# Altium PCB optics.PcbDoc
Units mm, origin at the board's own origin, x right, y up, seen from the top; angles counter-clockwise.
Board outline 50 x 50 mm, 2 copper layers (Top Layer, Bottom Layer); 15 components, 21 nets, 102 pads, 0 vias.
Unrouted connection lines stored in the file: 1.
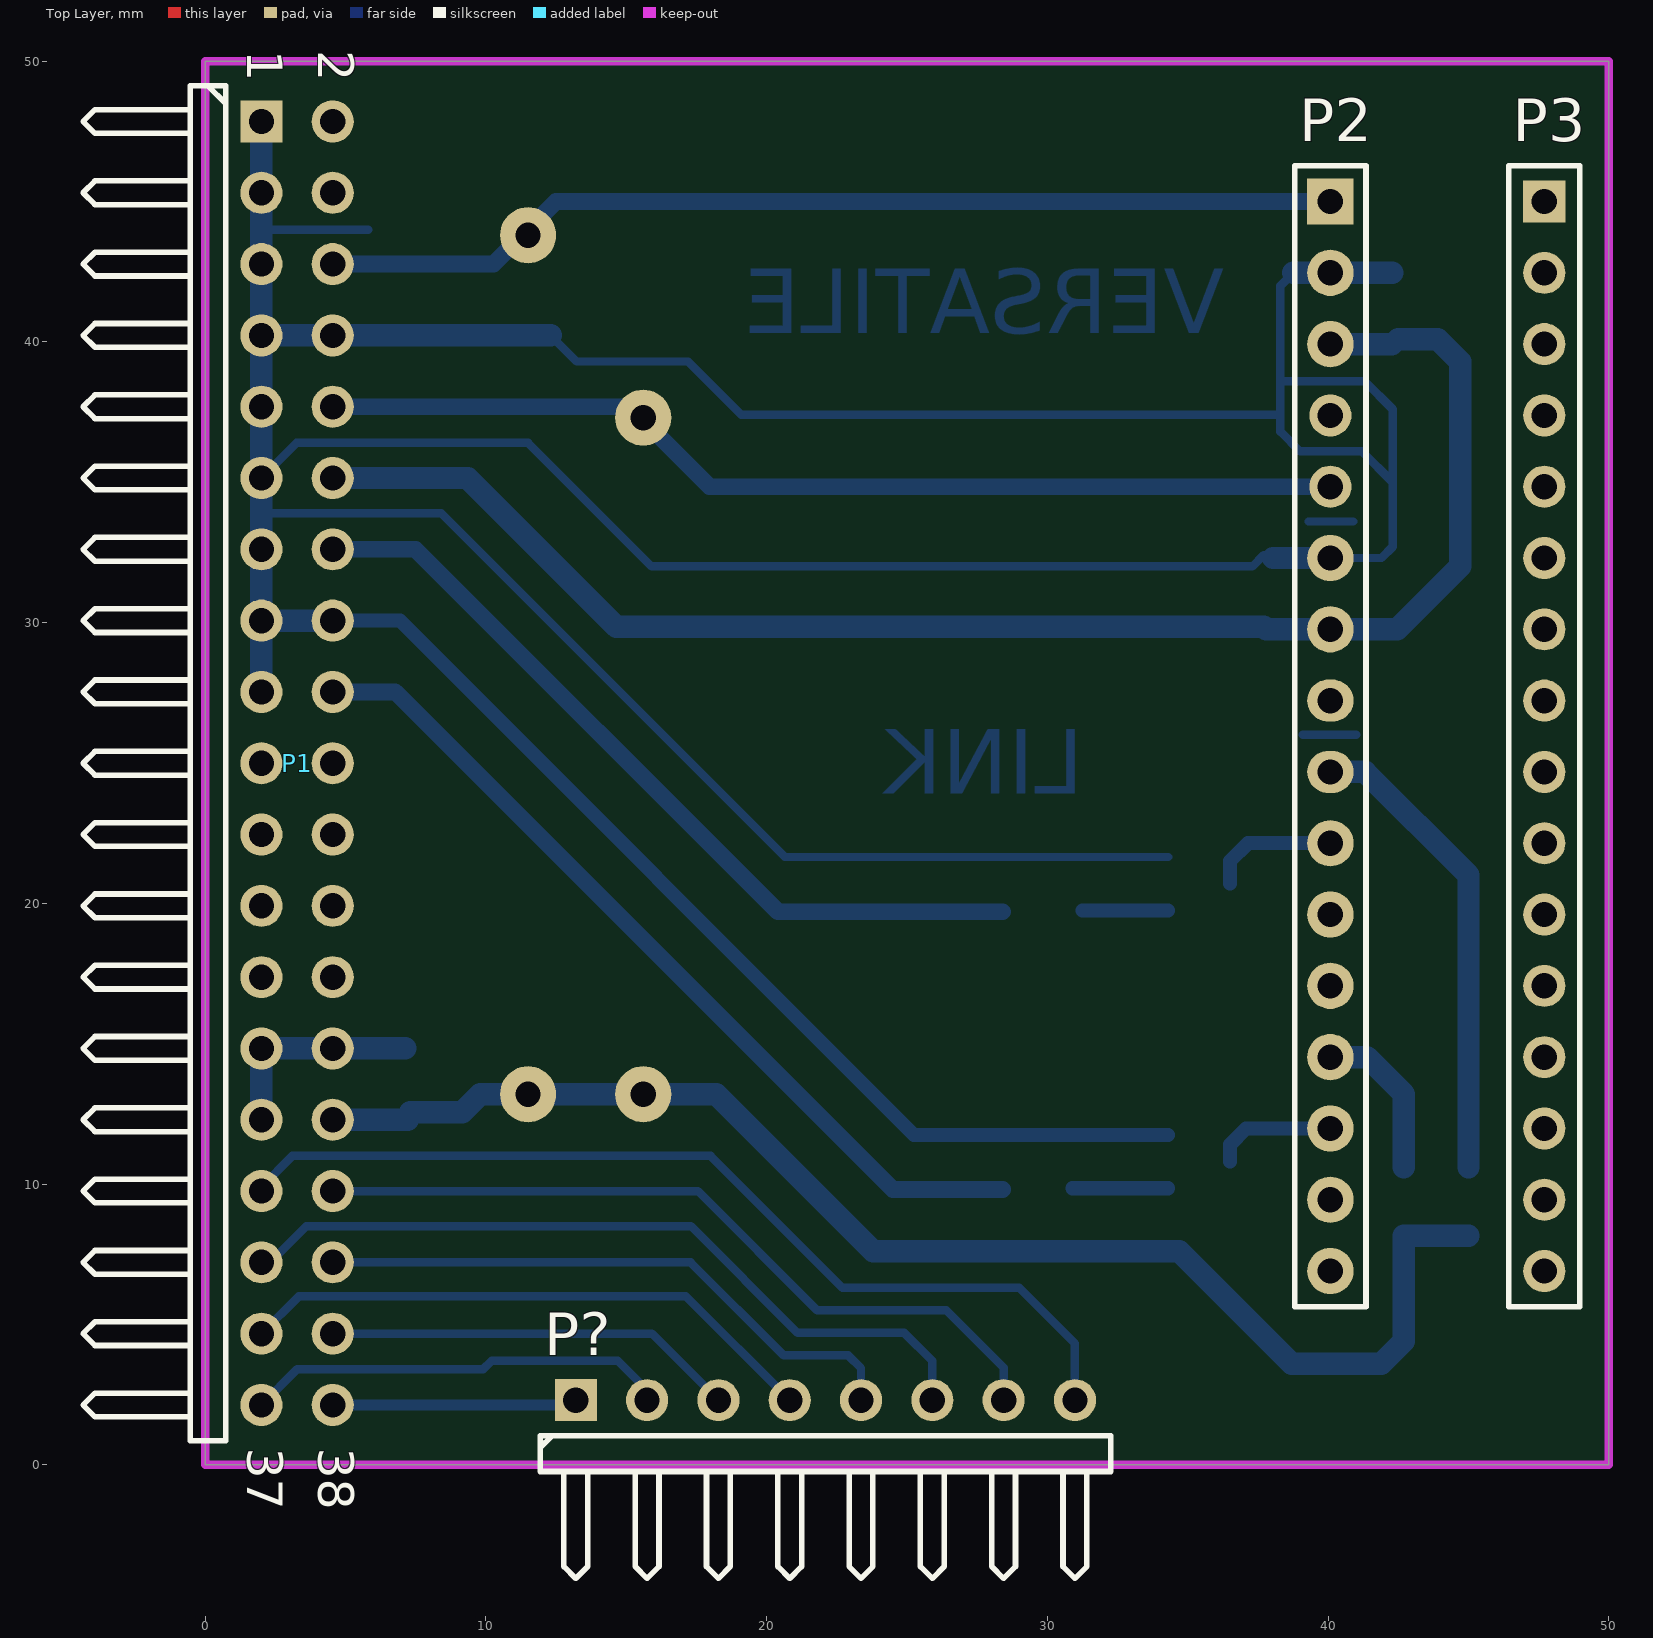
[diagram p0: Top Layer view]
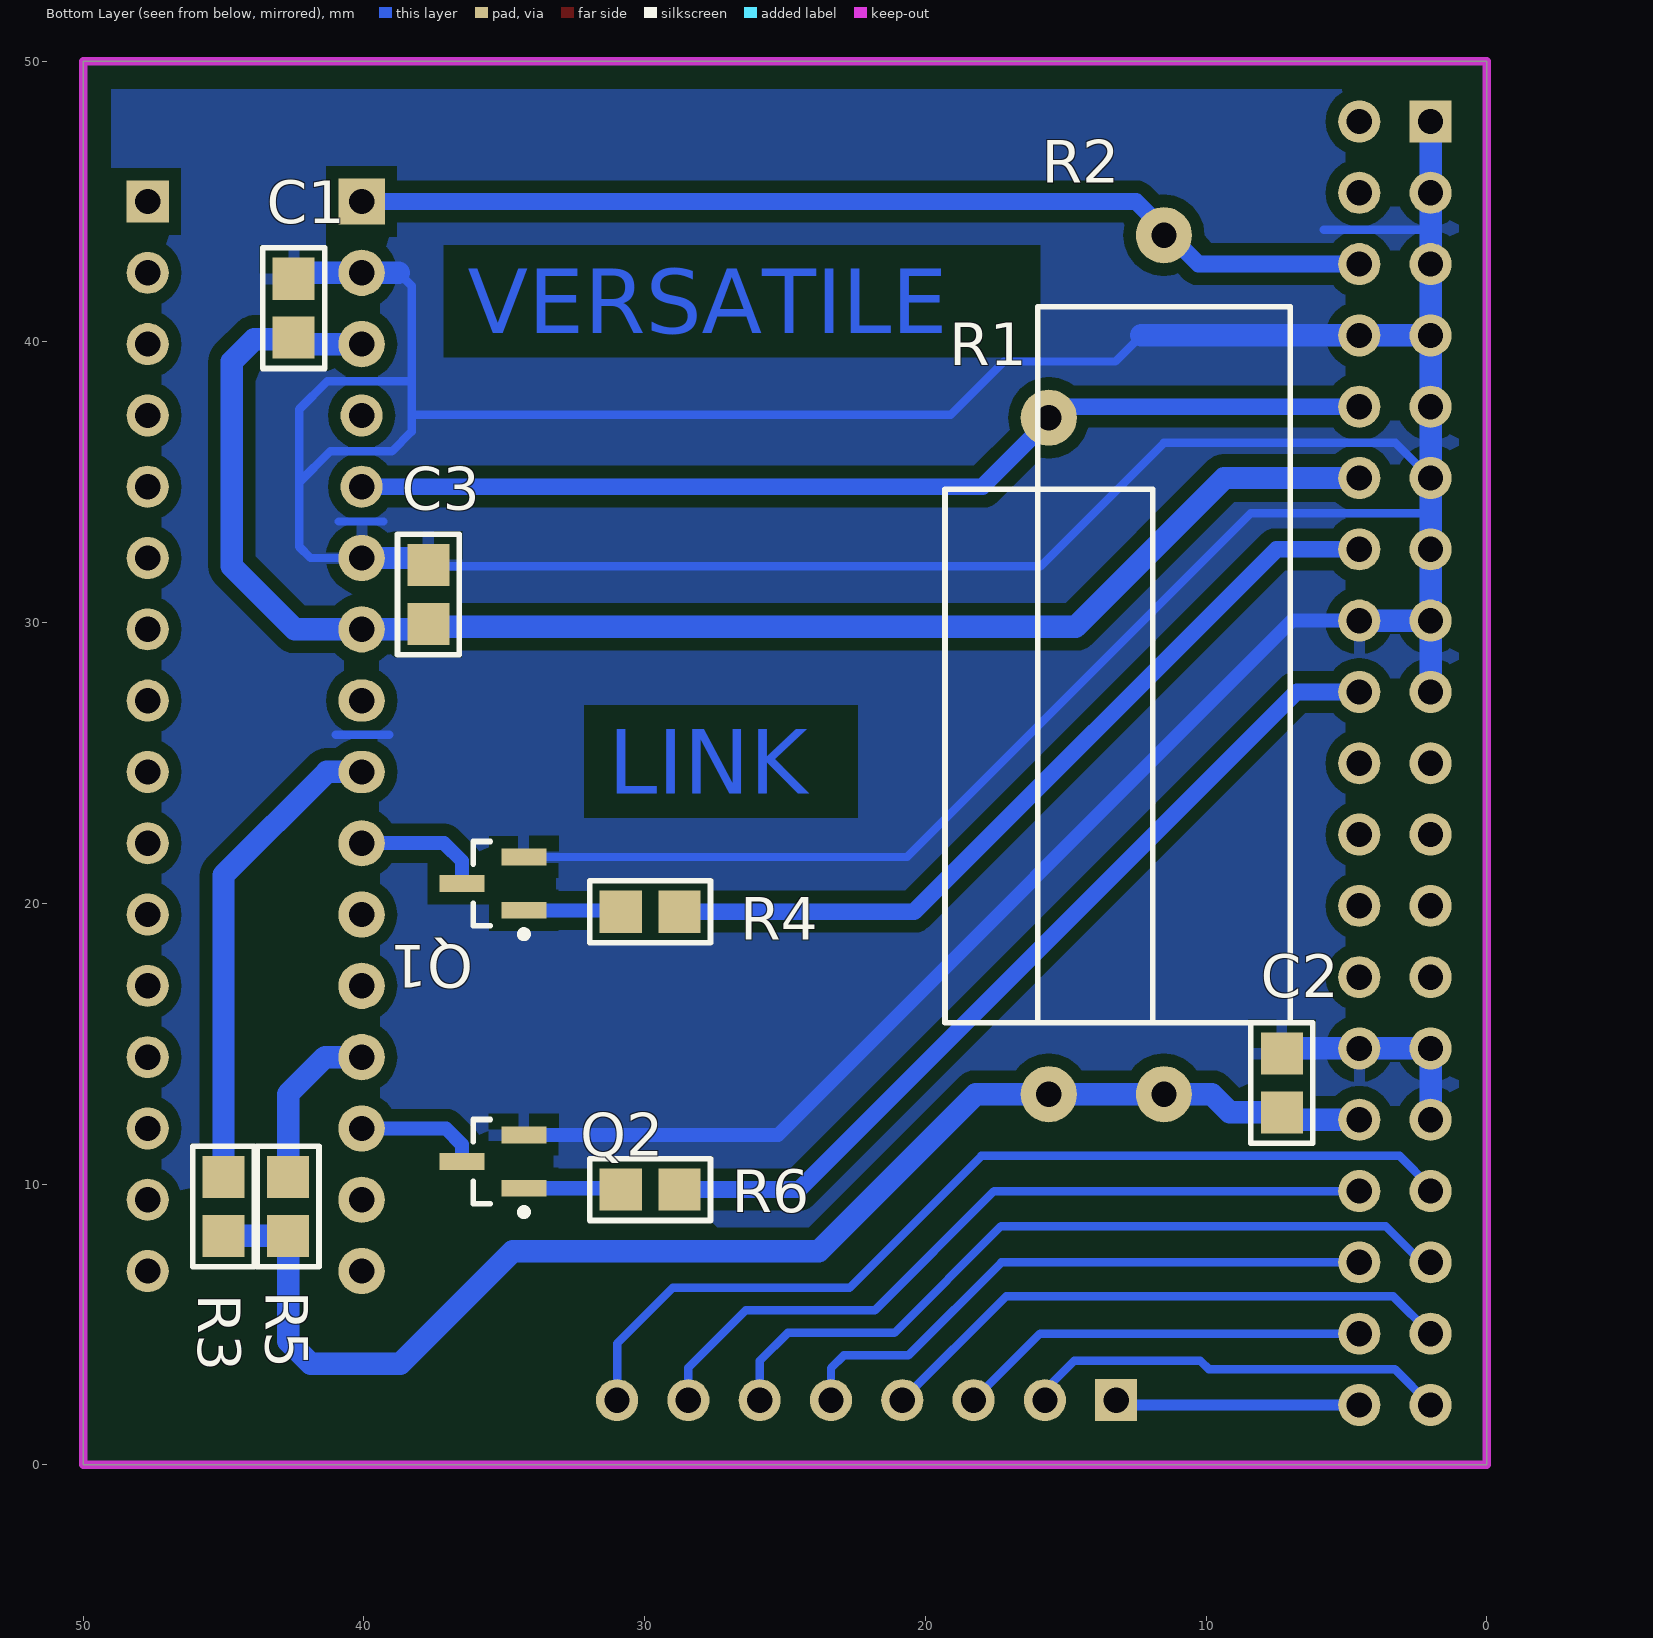
[diagram p1: Bottom Layer view, seen from below]
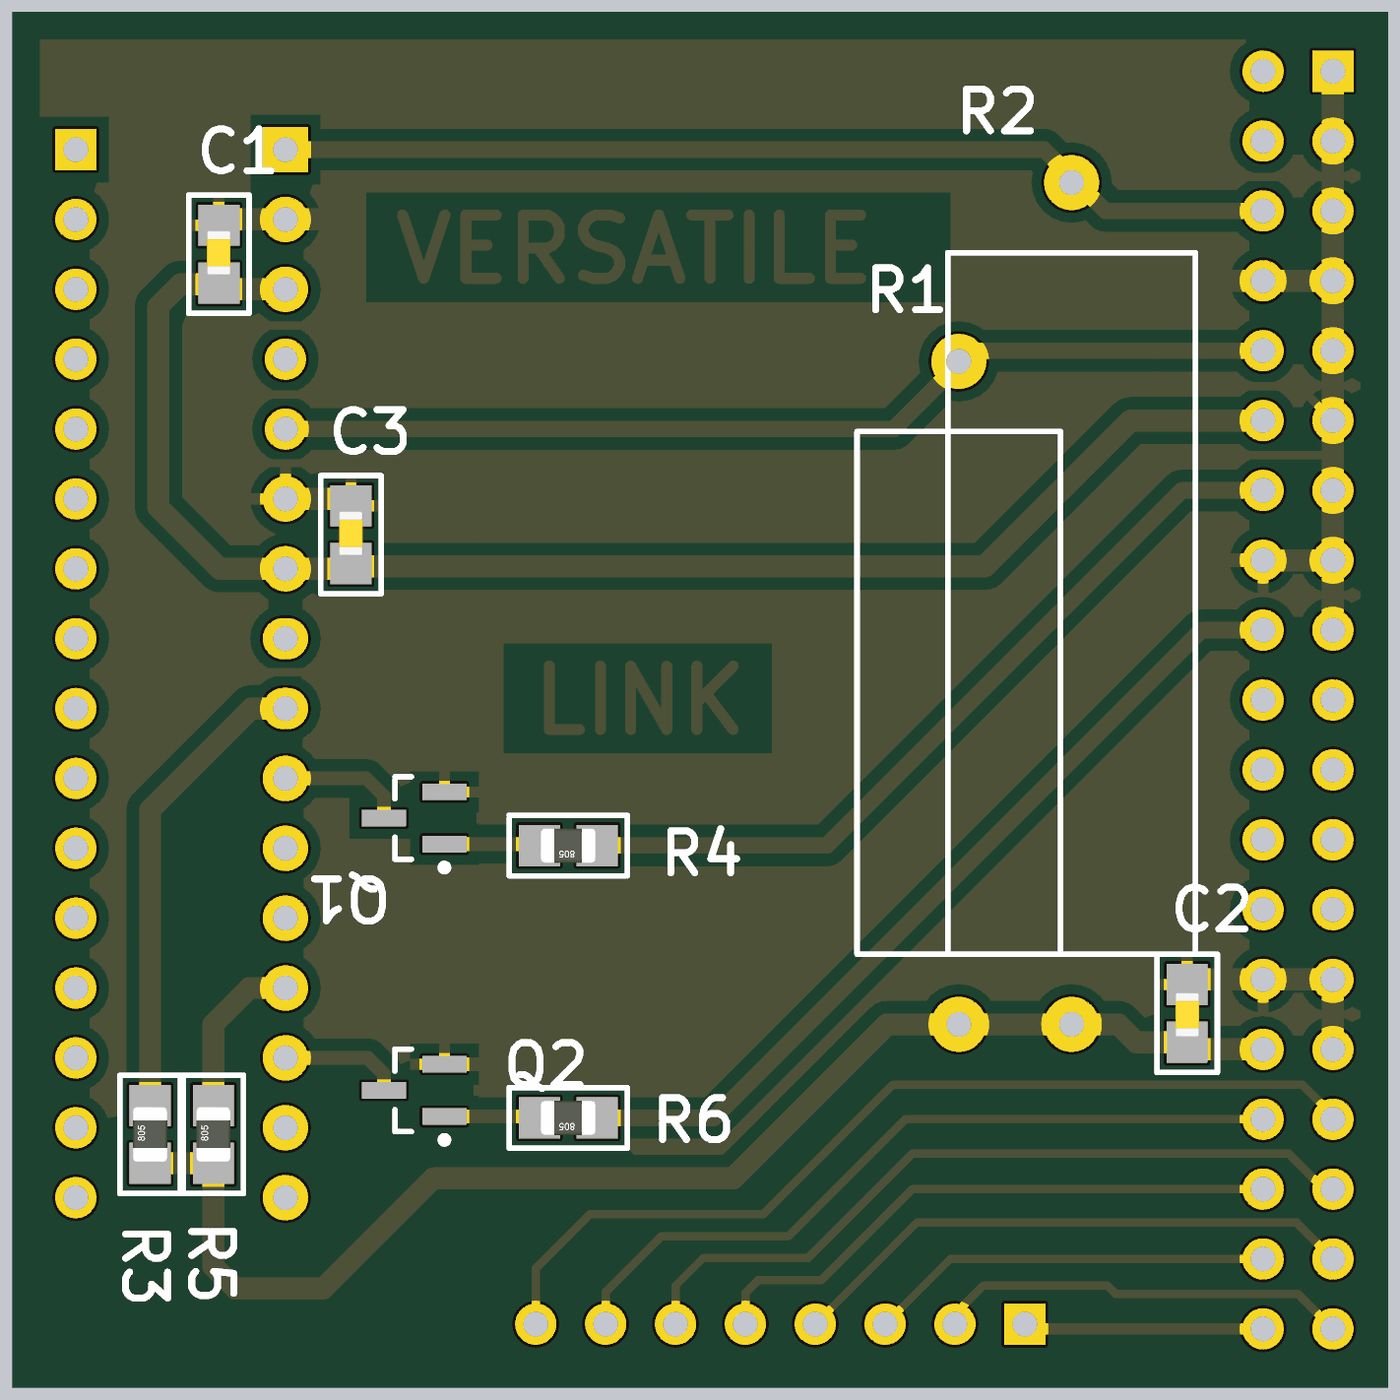
[diagram p2: 3D render of the assembled board from below, using the file's embedded part models]

## Layer stack, top to bottom
Top Layer: signal copper 0.0356
Dielectric: dielectric 0.32, FR-4, Dk 4.8
Bottom Layer: signal copper 0.0356

## Board outline
0,0 50,0 50,50 0,50

## Design rules (kind name [scope] priority, off if disabled: settings)
Clearance PolyClearance [All vs InPolygon] p1: gap=0.45
Clearance [All] p2: gap=0.3
ComponentClearance [All] p1 off: gap=0.254 collisioncheckmode=3 verticalgap=0.254 showdistances=FALSE
PolygonConnect PolygonConnect_1 [All vs IsNamedPolygon('GND')] p1: connectstyle=Relief reliefconductorwidth=0.4 reliefentries=4 polygonreliefangle="90 Angle"
PolygonConnect [All] p2: connectstyle=Relief reliefconductorwidth=0.254 reliefentries=4 polygonreliefangle="90 Angle"
RoomDefinition optics [InComponentClass('optics')] p1 off: confinementstyle=ConfineIn formatcopy=TRUE lockcomponents=FALSE outline 51.181,1.524 143.002,1.524 143.002,56.769 51.181,56.769
RoutingVias [All] p1: holewidth=0.6 width=1 viastyle="Through Hole" minholewidth=0.711 minwidth=1.27 maxholewidth=0.711 maxwidth=1.27
SilkscreenOverComponentPads [All] p1: minsilkscreentomaskgap=0.254
SolderMaskExpansion [All] p1: expansion=0.102
Width [All] p1: maxlimit=10 minlimit=0.3 preferedwidth=0.3 toplayer_maxwidth=0.3 minimp=50.000000 maximp=50.000000 favimp=50.000000
26 further rules are at their usual default settings.

## Components (designator, comment, footprint, x,y, rotation, side; value= is the part's Value field where it differs from the comment)
C1 "Cap" 2012[0805]_CAP 42.5,41.2 r90 bottom
C2 "Cap" 2012[0805]_CAP 7.3,13.6 r270 bottom
C3 "Cap" 2012[0805]_CAP 37.7,31 r90 bottom
P1 "Header 19X2H" HDR2X19H 2,47.85 r270 top
P2 "Header 16" HDR1X16#1 40.08,45 r270 top
P3 "Header 16" HDR1X16#2 47.7,45 r270 top
P? "Header 8H" HDR1X8H 13.2,2.3 r0 top
Q1 "2N7002" SOT23_M 35.4,20.7 r0 bottom
Q2 "2N7002" SOT23_M 35.4,10.8 r0 bottom
R1 "Res1" RES24.1-19X7.4 15.6,25.25 r270 bottom
R2 "Res1" RES30.6-25.5X9 11.5,28.5 r270 bottom
R3 "Res1" 2012[0805]_RES 45,9.2 r90 bottom
R4 "Res1" 2012[0805]_RES 29.8,19.7 r0 bottom
R5 "Res1" 2012[0805]_RES 42.7,9.2 r90 bottom
R6 "Res1" 2012[0805]_RES 29.8,9.8 r0 bottom

## Footprints (in the part's own frame and the unit in brackets; to place one, negate y for a bottom-side part, rotate by r counter-clockwise, add the part's x,y. Pads: shape width x height; smd on the part's side, far side on the other; paste and mask are expansions set on the pad)
2012[0805]_CAP [mm] "Chip Resistor / Capacitor; Body 2.0 x 1.3 mm (LxW typ) Handsoldering optimized"
  rect 1.5x1.5 smd: 1(-1.05,0) 2(1.05,0)
  silkscreen extent -2.15,-1.1 2.15,1.1, body extent -0.75,-0.43 0.85,0.43, height 0.8
2012[0805]_RES [mm] "Chip Resistor / Capacitor; Body 2.0 x 1.3 mm (LxW typ) Handsoldering optimized"
  rect 1.5x1.5 smd: 1(-1.05,0) 2(1.05,0)
  silkscreen extent -2.15,-1.1 2.15,1.1, body extent -1,-0.63 1,0.62, height 0.78
HDR1X8H [mm] "Connector; Header; 8 Position; Right Angle"
  rect 1.5x1.5 hole 0.9: 1(0,0)
  round 1.5 hole 0.9: 2(2.54,0) 3(5.08,0) 4(7.62,0) 5(10.16,0) 6(12.7,0) 7(15.24,0) 8(17.78,0)
  silkscreen extent -1.27,-6.35 19.05,-1.27
HDR1X16#1 [mm] "Connector; Header; 16 Position"
  rect 1.65x1.65 hole 0.9: 1(0,0)
  round 1.65 hole 0.9: 2(2.54,0) 3(5.08,0) 6(12.7,0) 7(15.24,0) 10(22.86,0) 11(25.4,0) 12(27.94,0) 13(30.48,0) 14(33.02,0) 15(35.56,0) 16(38.1,0)
  round 1.5 hole 0.9: 4(7.62,0) 5(10.16,0)
  oval 1.5x1.65 hole 0.9: 8(17.78,0) 9(20.32,0)
  silkscreen extent -1.27,-1.27 39.37,1.27
HDR1X16#2 [mm] "Connector; Header; 16 Position"
  rect 1.5x1.5 hole 0.9: 1(0,0)
  round 1.5 hole 0.9: 2(2.54,0) 3(5.08,0) 4(7.62,0) 5(10.16,0) 6(12.7,0) 7(15.24,0) 8(17.78,0) 9(20.32,0) 10(22.86,0) 11(25.4,0) 12(27.94,0) 13(30.48,0) 14(33.02,0) 15(35.56,0) 16(38.1,0)
  silkscreen extent -1.27,-1.27 39.37,1.27
HDR2X19H [mm] "Connector; Header; 19x2 Position; Right Angle"
  rect 1.5x1.5 hole 0.9: 1(0,0)
  round 1.5 hole 0.9: 2(0,2.54) 3(2.54,0) 4(2.54,2.54) 5(5.08,0) 6(5.08,2.54) 7(7.62,0) 8(7.62,2.54) 9(10.16,0) 10(10.16,2.54) 11(12.7,0) 12(12.7,2.54) 13(15.24,0) 14(15.24,2.54) 15(17.78,0) 16(17.78,2.54) 17(20.32,0) 18(20.32,2.54) 19(22.86,0) 20(22.86,2.54) 21(25.4,0) 22(25.4,2.54) 23(27.94,0) 24(27.94,2.54) 25(30.48,0) 26(30.48,2.54) 27(33.02,0) 28(33.02,2.54) 29(35.56,0) 30(35.56,2.54) 31(38.1,0) 32(38.1,2.54) 33(40.64,0) 34(40.64,2.54) 35(43.18,0) 36(43.18,2.54) 37(45.72,0) 38(45.72,2.54)
  silkscreen extent -1.27,-6.35 46.99,-1.27
RES24.1-19X7.4 [mm] "Resistor, Axial; Body 19 x 7.4 x 7.4mm (LxWxH max), Lead Dia. 0.85 mm (max)"
  round 2 hole 0.9: 1(-12.05,0) 2(12.05,0)
  silkscreen extent -9.5,-3.7 9.5,3.7
RES30.6-25.5X9 [mm] "Resistor, Axial; Body 25.5 x 9 mm (LxDia. max), Lead Dia. 0.85 mm (max)"
  round 2 hole 0.9: 1(-15.3,0) 2(15.3,0)
  silkscreen extent -12.75,-4.5 12.75,4.5
SOT23_M [mm] "SOT23, 3-Leads, Body 2.9x1.3mm, Pitch 0.95mm, Lead Span 2.3mm, IPC Low Density"
  rect 1.6x0.6 smd: 1(-1.1,0.95) 2(-1.1,-0.95) 3(1.1,0)
  silkscreen extent -1.22,-1.5 0.7,1.92, body extent -0.7,-1.5 0.7,1.5, height 1.1

## Part data
C1 C2 C3: "Capacitor"
P1: "Header, 19-Pin, Dual row, Right Angle"
P2 P3: "Header, 16-Pin"
P?: "Header, 8-Pin, Right Angle"
Q1 Q2: "N-channel Enhancement Mode Field-effect Transistor"
R1 R2 R3 R4 R5 R6: "Resistor"

## Nets (pads, with @x,y where several pads share a name; then routed paths per layer and width w, separated by ;. In a path a pad name is that pad's centre, name@x,y a point inside that pad or via, vN(x,y) a via of type N, cw(c..) or ccw(c..) an arc to the next point about the centre after c; other vN are vias at no path point)
EXT0: P1.31 P?.8 | length 34.4
  Bottom Layer w0.3: P1.31 2,9.9 3.1,11 18,11 22.7,6.3 29,6.3 30.98,4.32 P?.8
EXT1: P1.32 P?.7 | length 27.7
  Bottom Layer w0.3: P1.32 17.55,9.75 21.8,5.5 26.4,5.5 28.44,3.46 P?.7
EXT2: P1.33 P?.6 | length 27.8
  Bottom Layer w0.3: P1.33 2.31,7.21 3.6,8.5 17.3,8.5 21.1,4.7 24.9,4.7 25.9,3.7 P?.6
EXT3: P1.34 P?.5 | length 21.5
  Bottom Layer w0.3: P1.34 17.29,7.21 20.6,3.9 22.9,3.9 23.36,3.44 P?.5
EXT4: P1.35 P?.4 | length 20.9
  Bottom Layer w0.3: P1.35 3.33,6 17.12,6 P?.4
EXT5: P1.36 P?.3 | length 14.7
  Bottom Layer w0.3: P1.36 15.91,4.67 P?.3
EXT6: P1.37 P?.2 | length 15.2
  Bottom Layer w0.3: P1.37 3.27,3.4 9.9,3.4 10.2,3.7 14.7,3.7 15.74,2.66 P?.2
EXT7: P1.38 P?.1 | length 8.5
  Bottom Layer w0.4: P1.38 P?.1@13.03,2.13
GND: C1.2 C2.1 C3.2 P1.1 P1.3 P1.5 P1.7 P1.8 P1.9 P1.11 P1.13 P1.15 P1.16 P1.17 P1.27 P1.28 P1.29 P2.2 P2.6 Q1.2 Q2.2 | length 215.7
  Bottom Layer w0.3: 2,33.9 8.4,33.9 20.65,21.65 Q1.2 ; P1.11 3.25,36.4 11.5,36.4 15.9,32 37.3,32 C3.2@37.7,32.4 ; 2.2,44 5.8,44 ; 12.3,40.23 13.23,39.3 17.2,39.3 19.1,37.4 38.3,37.4 ; 38.5,38.6 41.3,38.6 42.3,37.6 42.3,35 ; 38.76,42.46 38.3,42 38.3,37.4 ; 39.1,26 41,26 ; 39.3,33.6 40.9,33.6 ; P2.6 41.9,32.3 42.3,32.7 42.3,35 ; 38.3,37.4 38.3,36.8 39,36.1 41.2,36.1 42.3,35
  Bottom Layer w0.5: P1.16 6.93,30.07 25.25,11.75 Q2.2
  Bottom Layer w0.8: P1.29 P1.27 P1.28 C2.1@7.13,14.83 ; P1.17 P1.15 ; P1.1 P1.3 P1.5 P1.7 ; P1.16 P1.15 ; 12.3,40.23 P1.8 P1.7 ; C3.2@38.05,32.3 P2.6 ; 38.76,42.46 P2.2 C1.2@42.29,42.46 ; P1.15 P1.13 2,33.9 P1.11 P1.9 P1.7
NetP2_9: P2.9 R3.2 | length 16.8
  Bottom Layer w0.8: P2.9 41.32,24.68 45,21 R3.2@45,10.6
NetP2_10: P2.10 Q1.3 | length 4.6
  Bottom Layer w0.5: Q1.3 36.5,21.5 37.14,22.14 P2.10
NetP2_13: P2.13 R5.2 | length 5.8
  Bottom Layer w0.8: P2.13 41.38,14.52 42.7,13.2 R5.2@42.7,10.6
NetP2_14: P2.14 Q2.3 | length 4.4
  Bottom Layer w0.5: Q2.3 36.5,11.4 37.08,11.98 P2.14
NetQ1_1: Q1.1 R4.2 | length 3.1
  Bottom Layer w0.5: R4.2@31.25,19.75 Q1.1
NetQ2_1: Q2.1 R6.2 | length 3.4
  Bottom Layer w0.5: R6.2@30.9,9.85 Q2.1
RX0: P1.6 P2.1 R2.1 | length 36.5
  Bottom Layer w0.6: P1.6 10.27,42.77 12.5,45 P2.1
RX1: P1.10 P2.5 R1.1 | length 36.7
  Bottom Layer w0.6: P1.10 15.11,37.69 17.96,34.84 P2.5
TX0: P1.14 R4.1 | length 29.2
  Bottom Layer w0.6: P1.14 7.49,32.61 20.4,19.7 R4.1@28.4,19.7
TX1: P1.18 R6.1 | length 31.2
  Bottom Layer w0.6: P1.18 6.77,27.53 24.5,9.8 R6.1@28.4,9.8
V5: C1.1 C3.1 P1.12 P2.3 P2.7 | length 55.4
  Bottom Layer w0.5: C3.1@37.7,29.85 C3.1@37.79,29.76 ; C1.1@42.5,40.1 C1.1
  Bottom Layer w0.8: P1.12 9.35,35.15 14.65,29.85 C3.1@37.7,29.85 ; C3.1@37.79,29.76 P2.7 42.46,29.76 44.7,32 44.7,39.3 43.9,40.1 C1.1@42.5,40.1 ; P2.3 C1.1@42.27,39.92
V33: C2.2 P1.30 R1.2 R2.2 R3.1 R5.1 | length 51
  Bottom Layer w0.3: R5.1@42.6,8 42.7,8 R3.1@44.9,8
  Bottom Layer w0.8: P1.30 C2.2@7.21,12.29 ; C2.2 9.15,12.55 9.8,13.2 R2.2 R1.2 18.2,13.2 23.8,7.6 34.7,7.6 38.7,3.6 41.9,3.6 42.7,4.4 42.7,8 R5.1 R3.1
pads on no net: P1.2 P1.4 P1.19 P1.20 P1.21 P1.22 P1.23 P1.24 P1.25 P1.26 P2.4 P2.8 P2.11 P2.12 P2.15 P2.16 P3.1 P3.2 P3.3 P3.4 P3.5 P3.6 P3.7 P3.8 P3.9 P3.10 P3.11 P3.12 P3.13 P3.14 P3.15 P3.16

## Polygon pours and split planes (outlines as drawn)
GND on Bottom Layer "GND" (solid, remove dead copper, pour order 2): 1,1 1,49 49,49 49,1

## Keep-outs
Keep-Out Layer:
  the board outline again, w0.3

## Other copper
Bottom Layer:
  text "VERSATILE" at 36.3,40.3 h2.3
  text "LINK" at 31.3,23.9 h2.3

## Silkscreen, mask and mechanical layers (free items; w line width, h text height)
Drill Drawing:
  text ".LEGEND" at 55.08,5.08 h1.52
  text "Drill Drawing." at 55.08,2.54 h1.52

## Dimensions
0,0 to 0,50 on Mechanical 1
0,0 to 50,0 on Mechanical 1

## Text inside footprints (layer, text, board x,y; h text height)
P1: Top Overlay "2" at 4.032,50.39 h1.27 r270; Top Overlay "1" at 1.492,50.39 h1.27 r270; Top Overlay "37" at 1.492,0.606 h1.27 r270; Top Overlay "38" at 4.032,0.606 h1.27 r270